# Altium PCB PCB1.PcbDoc
Units mil, origin at the board's own origin, x right, y up, seen from the top; angles counter-clockwise.
Board outline 2982.05 x 2982.05 mil, 2 copper layers (Top Layer, Bottom Layer), stack 60.4 mil thick; 11 components, 12 nets, 39 pads, 0 vias.
Unrouted connection lines stored in the file: 11.
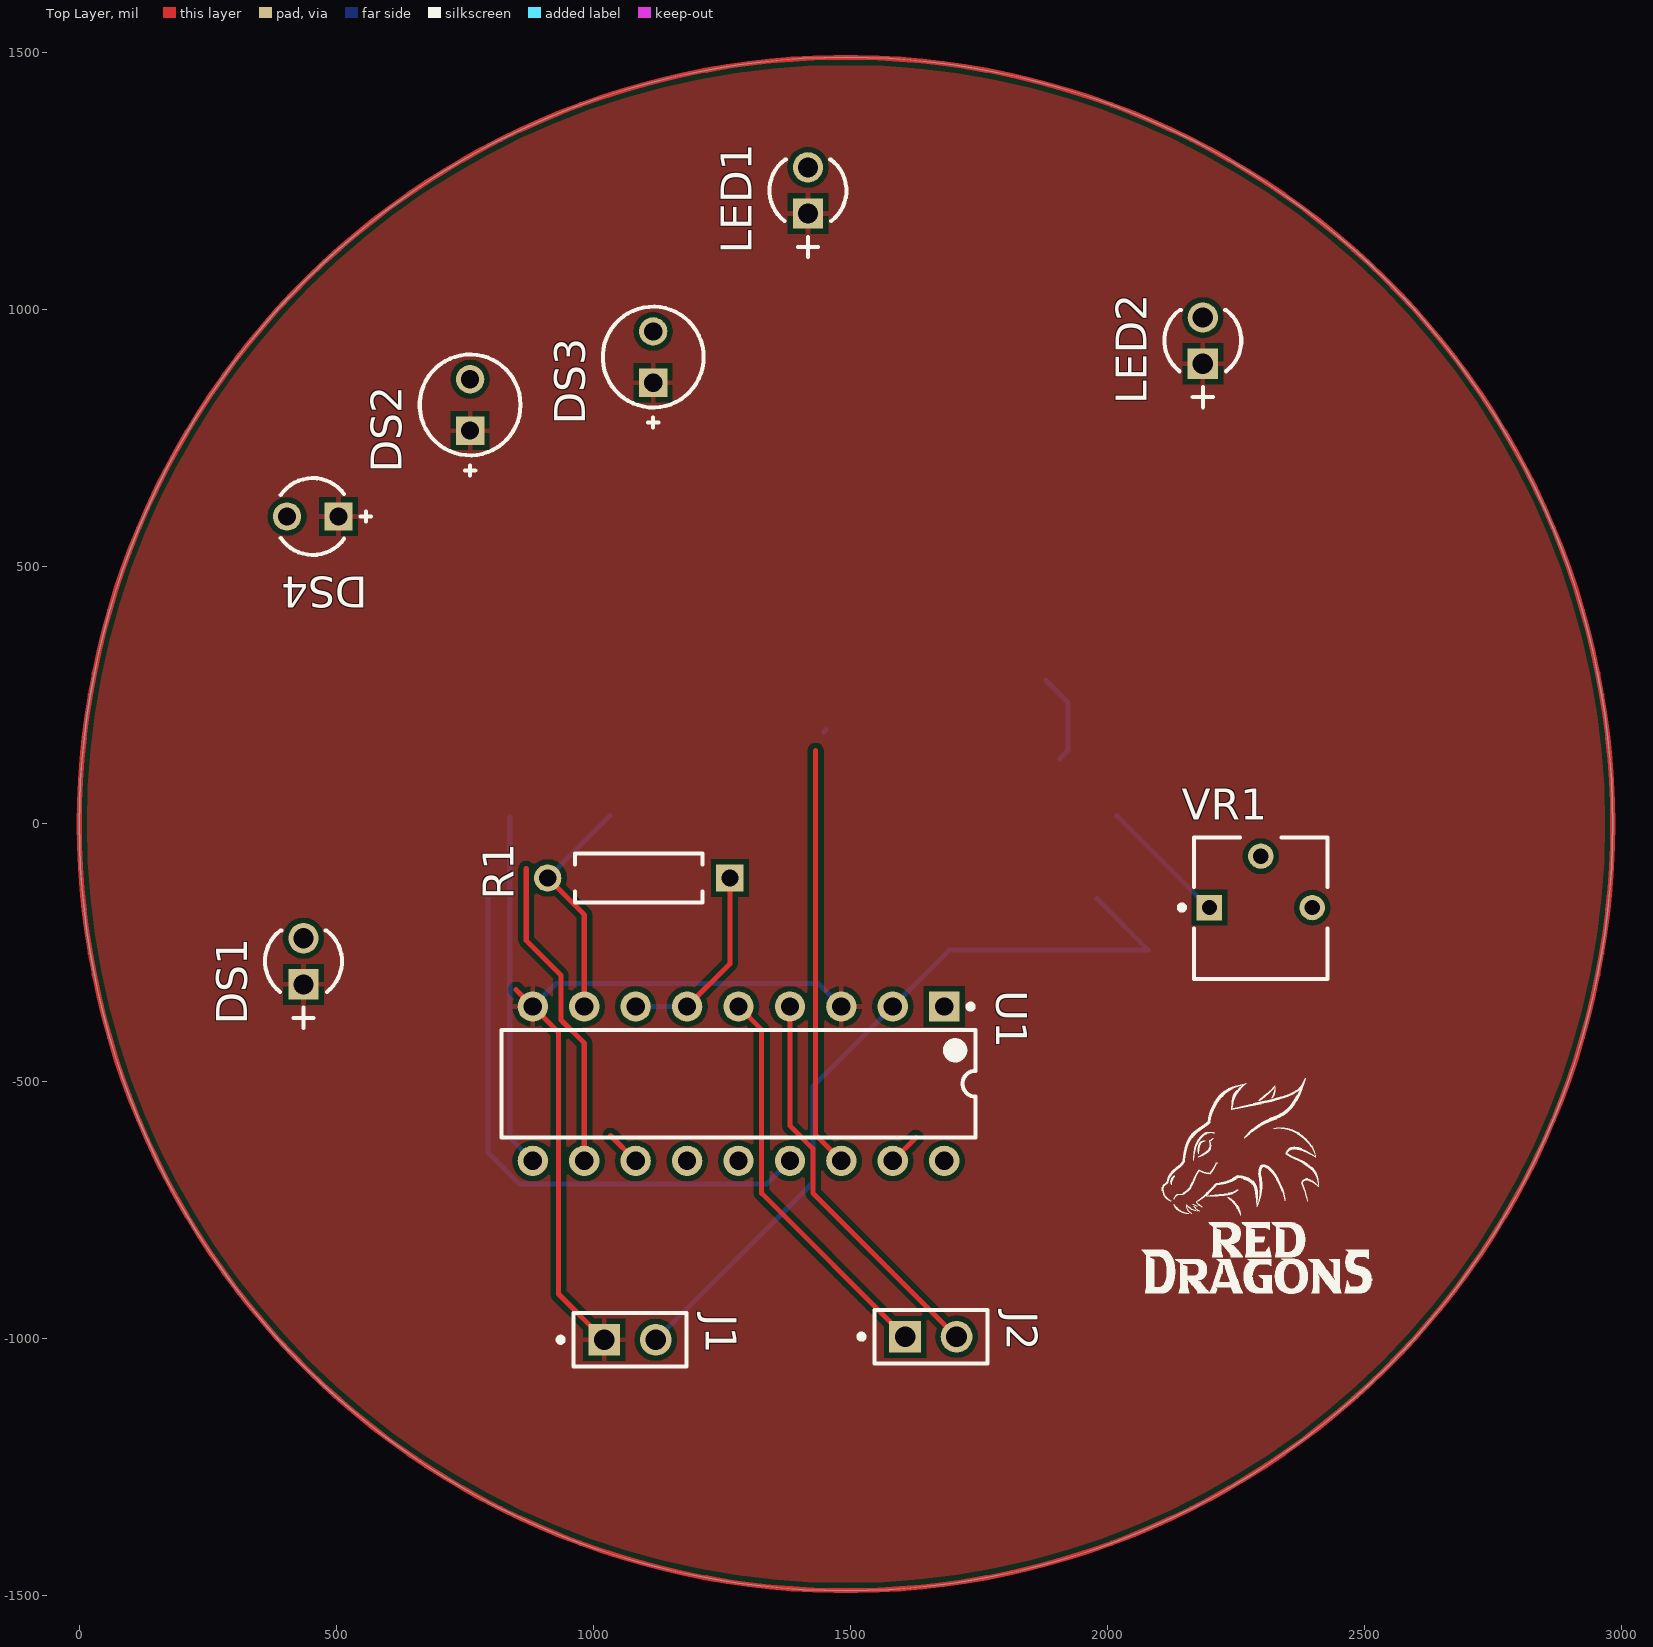
[diagram p0: Top Layer view]
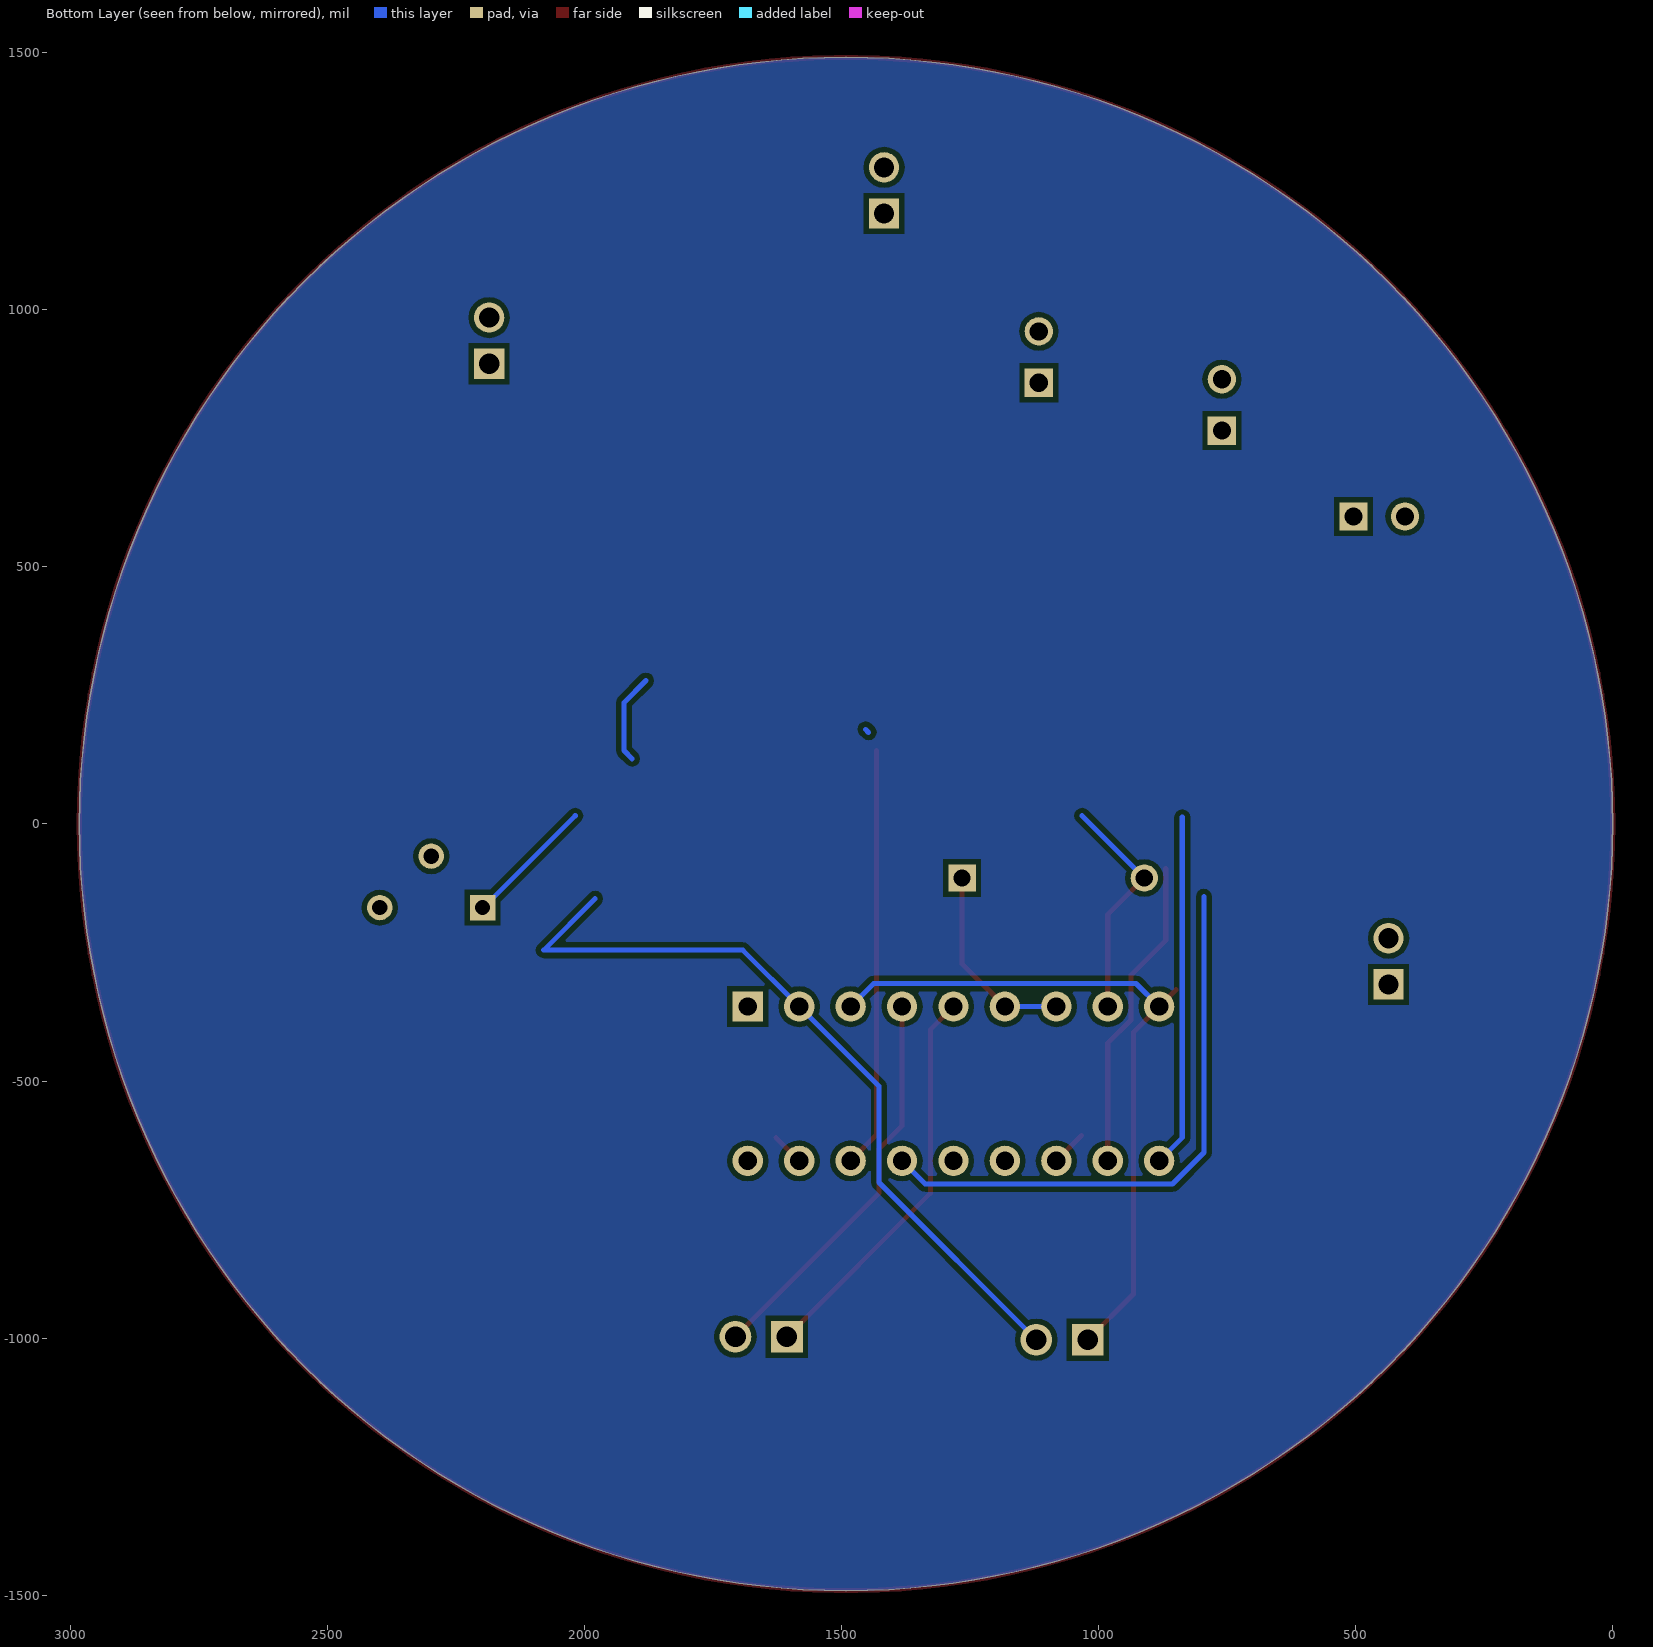
[diagram p1: Bottom Layer view, seen from below]

## Layer stack, top to bottom
Top Solder: solder mask 0.5, Solder Resist, Dk 3.3
Top Layer: signal copper 0.7
Dielectric1: core 59, FR-4, Dk 4.3
Bottom Layer: signal copper 0.7
Bottom Solder: solder mask 0.5, Solder Resist, Dk 3.3

## Board outline
0,0 ccw(c1491.02,0) 1491.02,-1491.02 ccw(c1491.02,0) 2982.05,0 ccw(c1491.02,0) 1491.02,1491.02 ccw(c1491.02,0)

## Design rules (kind name [scope] priority, off if disabled: settings)
Clearance [All] p1: gap=10 ignorepadtopadclearanceinfootprint=FALSE
DiffPairsRouting [All] p1: maxlimit=10 minlimit=10 mostfreqgap=10 toplayer_minwidth=10 toplayer_maxwidth=10 toplayer_prefwidth=10 bottomlayer_minwidth=10 bottomlayer_maxwidth=10 bottomlayer_prefwidth=10 maxuncoupledlength=500
HoleSize [All] p1: absolutevalues=TRUE maxlimit=300 minlimit=10 maxpercent=80.000 minpercent=20.000
MinimumAnnularRing [All] p1: minimumring=10
PasteMaskExpansion [All] p1: expansion=10
PlaneClearance [All] p1: clearance=15
PlaneConnect [All] p1: pad.planeconnectstyle=Relief pad.reliefexpansion=20 pad.reliefentries=4 pad.reliefconductorwidth=10 pad.reliefairgap=10 via.planeconnectstyle=Direct via.reliefexpansion=20 via.reliefentries=4 via.reliefconductorwidth=10 via.reliefairgap=10
PolygonConnect [All] p1: thpad.connectstyle=Relief thpad.reliefconductorwidth=10 thpad.reliefentries=4 thpad.polygonreliefangle="90 Angle" thpad.airgapwidth=10 smdpad.connectstyle=Relief smdpad.reliefconductorwidth=10 smdpad.reliefentries=4 smdpad.polygonreliefangle="90 Angle" smdpad.airgapwidth=10 via.connectstyle=Direct via.reliefconductorwidth=10 via.reliefentries=4 via.polygonreliefangle="90 Angle" via.airgapwidth=10
RoomDefinition Sheet1 [InComponentClass('Sheet1')] p1: confinementstyle=ConfineIn formatcopy=TRUE lockcomponents=FALSE outline 3148,-185 6055,-185 6055,869 3148,869
RoutingVias [All] p1: holewidth=10 width=20 viastyle="Through Hole" minholewidth=10 minwidth=20 maxholewidth=10 maxwidth=20
SMDNeckDown [All] p1: percent=100.000
SilkToSolderMaskClearance SilkscreenOverComponentPads [IsPad] p1: minsilkscreentomaskgap=10 clearancetoexposedcopper=TRUE
SolderMaskExpansion [All] p1: expansion=10 istentingtop=FALSE
Width [All] p1: maxlimit=10 minlimit=10 preferedwidth=10
24 further rules are at their usual default settings.

## Classes and differential pairs
component class Sheet1: DS1 DS2 DS3 DS4 J1 J2 LED1 LED2 U1 VR1

## Components (designator, comment, footprint, x,y, rotation, side; value= is the part's Value field where it differs from the comment)
DS1 "304090040" LED-2P-2.28-3MM 436,-267 r90 top
DS2 "LTL-1CHYE" LTST-LTL-1CHYE 760,815 r90 top
DS3 "LTL-1CHYE" LTST-LTL-1CHYE 1116,908 r90 top
DS4 "LTL-1CHE" INDPR60-254-520X380X650 454,598 r180 top
J1 "M20-9990246" FP-M20-9990246-MFG 1071,-1003 r0 top
J2 "M20-9990246" FP-M20-9990246-MFG 1656,-997 r0 top
LED1 "304090040" LED-2P-2.28-3MM 1417,1232 r90 top
LED2 "304090040" LED-2P-2.28-3MM 2185,940 r90 top
R1 "MFR-25FBF52-1K" RESA60-630X240 1088.07,-105.02 r180 top value=1k
U1 "LM3915N-1" NFK0018A 1282,-505 r270 top
VR1 "3362P-1-103LF" BOUR-3362P 2297.66,-164 r0 top

## Footprints (in the part's own frame and the unit in brackets; to place one, negate y for a bottom-side part, rotate by r counter-clockwise, add the part's x,y. Pads: shape width x height; smd on the part's side, far side on the other; paste and mask are expansions set on the pad)
BOUR-3362P [mm] "THD, 3-Leads, Body 6.6x6.99mm, Pitch 2.54mm"
  rect 1.25x1.25 hole 0.75: 1(-2.54,0.035)
  round 1.25 hole 0.75: 2(0,2.575) 3(2.54,0.035)
  silkscreen extent -4.02,-3.49 3.3,3.5, body extent -3.3,-3.49 3.3,3.5, height 4.5
FP-M20-9990246-MFG [mm]
  rect 1.57x1.57 hole 1.02 paste-1000 mask+0: 1(-1.27,0)
  round 1.57 hole 1.02 paste-1000 mask+0: 2(1.27,0)
  silkscreen extent -3.55,-1.32 2.79,1.32, body extent -2.89,-1.42 2.89,1.42, height 0.25
INDPR60-254-520X380X650 [mm] "THD, 2-Leads, Dia 3.8mm, Pitch 2.54mm"
  rect 1.4x1.4 hole 0.9: 1(-1.27,0)
  round 1.4 hole 0.9: 2(1.27,0)
  silkscreen extent -2.87,-1.9 1.58,1.9, body extent -1.9,-1.9 1.9,1.9, height 6.5
LED-2P-2.28-3MM [mm] "LED, 2-Leads, Dia 3mm, Pitch 2.28mm"
  rect 1.5x1.5 hole 1: 1(-1.14,0)
  round 1.5 hole 1: 2(1.14,0)
  silkscreen extent -3.29,-1.9 1.52,1.9, body extent -1.9,-1.91 1.52,1.91, height 5.3
LTST-LTL-1CHYE [mm] "THD, 2-Leads, Dia 3.8mm, Pitch 2.54mm"
  rect 1.4x1.4 hole 0.9: 1(-1.27,0)
  round 1.4 hole 0.9: 2(1.27,0)
  silkscreen extent -3.49,-2.49 2.49,2.49, body extent -1.9,-1.9 1.9,1.9, height 6.5
NFK0018A [mm] "DIP, 18-Leads, Body 23.35x6.6mm, Pitch 2.54mm"
  rect 1.5x1.5 hole 0.9: 1(-3.81,10.16)
  round 1.5 hole 0.9: 2(-3.81,7.62) 3(-3.81,5.08) 4(-3.81,2.54) 5(-3.81,0) 6(-3.81,-2.54) 7(-3.81,-5.08) 8(-3.81,-7.62) 9(-3.81,-10.16) 10(3.81,-10.16) 11(3.81,-7.62) 12(3.81,-5.08) 13(3.81,-2.54) 14(3.81,0) 15(3.81,2.54) 16(3.81,5.08) 17(3.81,7.62) 18(3.81,10.16)
  silkscreen extent -3.93,-11.7 2.65,11.7, body extent -4.1,-11.43 4.1,11.43, height 4.21
RESA60-630X240 [mm] "Axial Resistor, 2-Leads, Dia 2.4mm, Body Length 6.3mm"
  rect 1.35x1.35 hole 0.85: 1(-4.5,0)
  round 1.35 hole 0.85: 2(4.5,0)
  silkscreen extent -3.15,-1.2 3.15,1.2, body extent -4.77,-1.19 4.77,1.2, height 2.4

## Part data
DS1 LED1 LED2: library part CMP-007-00006-2, "Green LED, 80 mW, 20 mA, -25 to 85 degC, 2-Pin THD", Manufacturer="Shenzhen CGX", Package Description="2-Pin Through Hole Device, Dia 3 mm, Pitch 2.28 mm", Case/Package=304090040, Datasheet URL=http://datasheet.octopart.com/304090040-Chengguangxing-datasheet-62330655.pdf, Datasheet Version="Rev. 1.0, 09/2014", Manufacturer URL=http://szcgx.com/, Mounting Technology=TH, Package Reference=304090040, RoHS Compliant=Unknown
DS2 DS3: library part CMP-007-00020-2, "LED Uni-Color Yellow, 60 mW, 20 mA, -55 to 100 degC, 2-Pin THD, RoHS, Bulk", Case/Package=Radial, Colour=Yellow, Forward Current=20mA, Forward Voltage=2.1V, Manufacturer=Lite-On, Max Operating Temperature=100°C, Min Operating Temperature=-55°C, Package Description="2-Pin Through Hole Device, Dia 3.8 mm, Pitch 2.54 mm", Package Quantity=1000, Datasheet URL=https://datasheet.ciiva.com/4269/s-110-ltl-1chye-4269126.pdf, Datasheet Version="Rev. B, 07/2013", Illumination Colour=Yellow, Lens Style=Dome, Luminous Intensity=40mcd, Manufacturer URL=http://www.us.liteon.com/, Mounting Technology=TH, Nominal Vf=2.1V, Package Reference=LTL-1CHYE, Packaging=Bulk, Pins=2, RoHS Compliant=True, Viewing Angle=45degrees
DS4: library part CMP-007-00018-2, "LED Uni-Color Red, 100 mW, 30 mA, -55 to 100 degC, 2-Pin THD, RoHS, Bulk", Case/Package=Radial, Colour=Red, Forward Current=20mA, Forward Voltage=2V, Manufacturer=Lite-On, Max Operating Temperature=100°C, Min Operating Temperature=-55°C, Package Description="2-Pin Through Hole Device, Dia 3.8 mm, Pitch 2.54 mm", Package Quantity=1000, Datasheet URL=https://datasheet.ciiva.com/15117/getdatasheetpartid-187746-15117985.pdf, Datasheet Version=Dec-03, Illumination Colour=Red, Lens Style=Dome, Luminous Intensity=12.6mcd, Manufacturer URL=http://www.us.liteon.com/, Mounting Technology=TH, Nominal Vf=2V, Package Reference=LTL-1CHE, Packaging=Bulk, Pins=2, RoHS Compliant=True, Viewing Angle=60degrees
J1 J2: library part CMP-15831-000009-1, "CONN HEADER VERT 2POS 2.54MM", Current Rating=3A, Manufacturer=Harwin, Temperature="-40°C to +105°C", Temperature Range High=+105°C, Temperature Range Low=-40°C, Automotive=No, Category=Conn, ComponentLink2Description=Datasheet, ComponentLink2URL=https://cdn.harwin.com/pdfs/M20-999.pdf, Conn Gender=Male, Conn Orientation=Vertical, Contact Material=Tin,Nickel, Device Class L1=Connectors, Device Class L2="Headers and Wire Housings", Device Class L3=unset, Digikey Description="CONN HEADER VERT 2POS 2.54MM", Height=8.99mm, Lead Free=Yes, Manufacturer Part Number=M20-9990246, Mouser Description="2.54mm (0.1\") Pitch SIL Vertical PC Tail Pin Header, 6.1mm mating pin height, tin, 2 contacts", Number of Contacts=2, Number of Rows=1, Octopart=https://octopart.com/m20-9990246-harwin-2590635, Package=M20-9990246, Pitch=2.54mm, RoHS=TRUE
R1: library part CMP-009-00048-4, "Axial Resistor, 1 KOhm, +/- 1%, 250 mW, -55 to 155 degC, 2-Pin THD, RoHS, Bulk", Case/Package=Axial, Manufacturer=Yageo, Max Operating Temperature=155°C, Min Operating Temperature=-55°C, Package Description="2-Pin Axial Lead, Dia 2.4 mm, Body Length 6.3 mm", Package Quantity=200, Package Reference=MFR-25, Power=250mW, Tolerance=1%, Voltage Rating=250V, Composition=CarbonFilm, Datasheet URL=http://www.yageo.com/documents/recent/Yageo%20LR_MFR_2013.pdf, Datasheet Version=Apr-13, Manufacturer URL=http://www.yageo.com/, Mounting Technology=TH, Packaging=Bulk, RoHS Compliant=True
U1: library part CMP-0058-00005-3, "Dot/Bar Display Driver, 18-pin MDIP", Manufacturer="Texas Instruments", PackageTopMarking=NSUZXYYTTE#*LM3915N-1, PowerWise=N, Code_JEDEC=MS-001-AC, ComponentLink1Description="Datasheet URL", ComponentLink1URL=http://www.ti.com/general/docs/lit/getliterature.tsp?genericPartNumber=LM3915&fileType=pdf, CompType="Audio IC", PackageDescription="MDIP, .900 x .250 x .155in, 18 Lead, .100in Pitch", PackageReference=NFK0018A, PinCount=18, RoHS=N
VR1: library part CMP-009-00039-2, "Square Trimpot(R) Trimming Potentiometer, 10 KOhm, 300 V, -55 to 125 degC, 3-Pin THD, RoHS, Tube", Case/Package=3326P, Manufacturer=Bourns, Max Operating Temperature=125°C, Min Operating Temperature=-55°C, Package Description="3-Pin Through Hole Device, Body 6.6 x 6.99 mm, Pitch 2.54 mm", Package Quantity=250, Power=500mW, Resistance=10k, Tolerance=10%, Voltage Rating=300V, Composition=Potentiometer, Datasheet URL=http://www.bourns.com/docs/Product-Datasheets/3362.pdf, Datasheet Version=May-16, Lead Pitch=2.54mm, Manufacturer URL=http://www.bourns.com/, Mounting Technology=TH, Package Reference=3326P, Packaging=Rail/Tube, Pins=3, RoHS Compliant=True

## Nets (pads, with @x,y where several pads share a name; then routed paths per layer and width w, separated by ;. In a path a pad name is that pad's centre, name@x,y a point inside that pad or via, vN(x,y) a via of type N, cw(c..) or ccw(c..) an arc to the next point about the centre after c; other vN are vias at no path point)
NetDS1_1: DS1.1 DS2.1 DS3.1 DS4.1 J1.1 LED1.1 LED2.1 U1.3 U1.9 | length 1397.5
  Top Layer w10: 849.33,-322.33 U1.9 932,-405 932,-914 J1.1
  Bottom Layer w10: U1.9 927,-310 1437,-310 U1.3 ; 1447,178.12 1453,184.12
NetDS1_2: DS1.2 U1.15 | length 1128.8
  Bottom Layer w10: 795,-141.12 795,-639 856,-700 1337,-700 U1.15
NetDS2_2: DS2.2 U1.11 | length 614.7
  Top Layer w10: 869.33,-87 869.33,-226.33 937,-294 937,-381 982,-426 U1.11
NetDS3_2: DS3.2 U1.12 | length 69.3
  Top Layer w10: 1033,-606 U1.12
NetDS4_2: DS4.2 U1.10 | length 863.1
  Bottom Layer w10: 837,13 837,-610 U1.10 ; 1880,279 1923,236 1923,143 1907,127
NetJ1_2: J1.2 U1.2 VR1.2 VR1.3 | length 1522.8
  Bottom Layer w10: J1.2 1427,-697 1427,-510 U1.2 1691.62,-245.38 2079,-245.38 1979,-145.38
NetJ2_1: J2.1 U1.5 | length 776.2
  Top Layer w10: U1.5 1327,-400 1327,-718 J2.1
NetJ2_2: J2.2 U1.4 | length 776.2
  Top Layer w10: U1.4 1382,-587 1426.53,-631.53 1426.53,-717.53 J2.2
NetLED1_2: LED1.2 U1.17 | length 63.6
  Top Layer w10: U1.17 1627,-610
NetLED2_2: LED2.2 U1.16 | length 818.6
  Top Layer w10: 1432,142.88 1432,-605 U1.16
NetR1_1: R1.1 U1.6 U1.7 | length 384.5
  Top Layer w10: U1.6 1265.24,-271.76 R1.1
  Bottom Layer w10: U1.7 U1.6
NetR1_2: R1.2 U1.8 VR1.1 | length 678.8
  Top Layer w10: R1.2 982,-176.12 U1.8
  Bottom Layer w10: R1.2 1031.93,16 ; 2017.62,16 VR1.1@2179,-145.38
pads on no net: U1.1 U1.13 U1.14 U1.18
copper on no net: | length 9368.4
  Top Layer w10: 2982.05,0 ccw(c1491.02,0) 2982.05,0

## Polygon pours and split planes (outlines as drawn)
NetDS1_1 on Top Layer "NETDS1_1_L01_P000" (solid, pour order 0): 0,0 ccw(c1491.02,0) 1491.02,-1491.02 ccw(c1491.02,0) 2982.05,0 ccw(c1491.02,0) 1491.02,1491.02 ccw(c1491.02,0)
no net on Bottom Layer "NONET_L02_P001" (solid, pour order 1): 0,0 ccw(c1491.02,0) 1491.02,-1491.02 ccw(c1491.02,0) 2982.05,0 ccw(c1491.02,0) 1491.02,1491.02 ccw(c1491.02,0)

## Silkscreen, mask and mechanical layers (free items; w line width, h text height)
Top Overlay:
  drawing of 95 lines, arcs and shapes, not listed